# Altium PCB PCB.PcbDoc
Units mm, origin at the board's own origin, x right, y up, seen from the top; angles counter-clockwise.
Board outline 18.8 x 41.15 mm, 2 copper layers (Top Layer, Bottom Layer); 4 components, 32 nets, 96 pads, 0 vias.
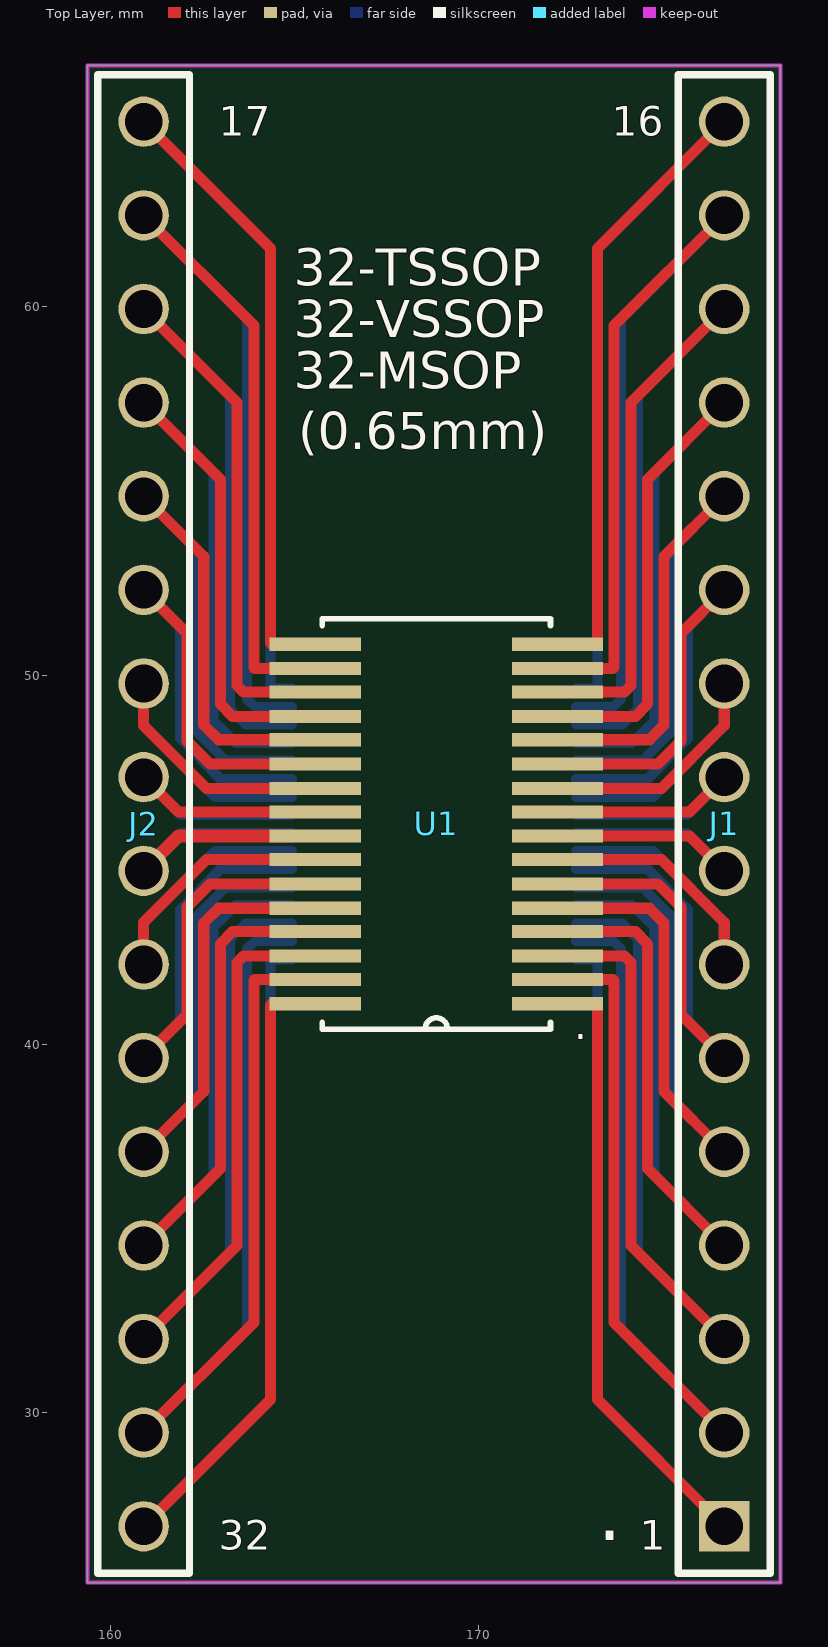
[diagram p0: Top Layer view]
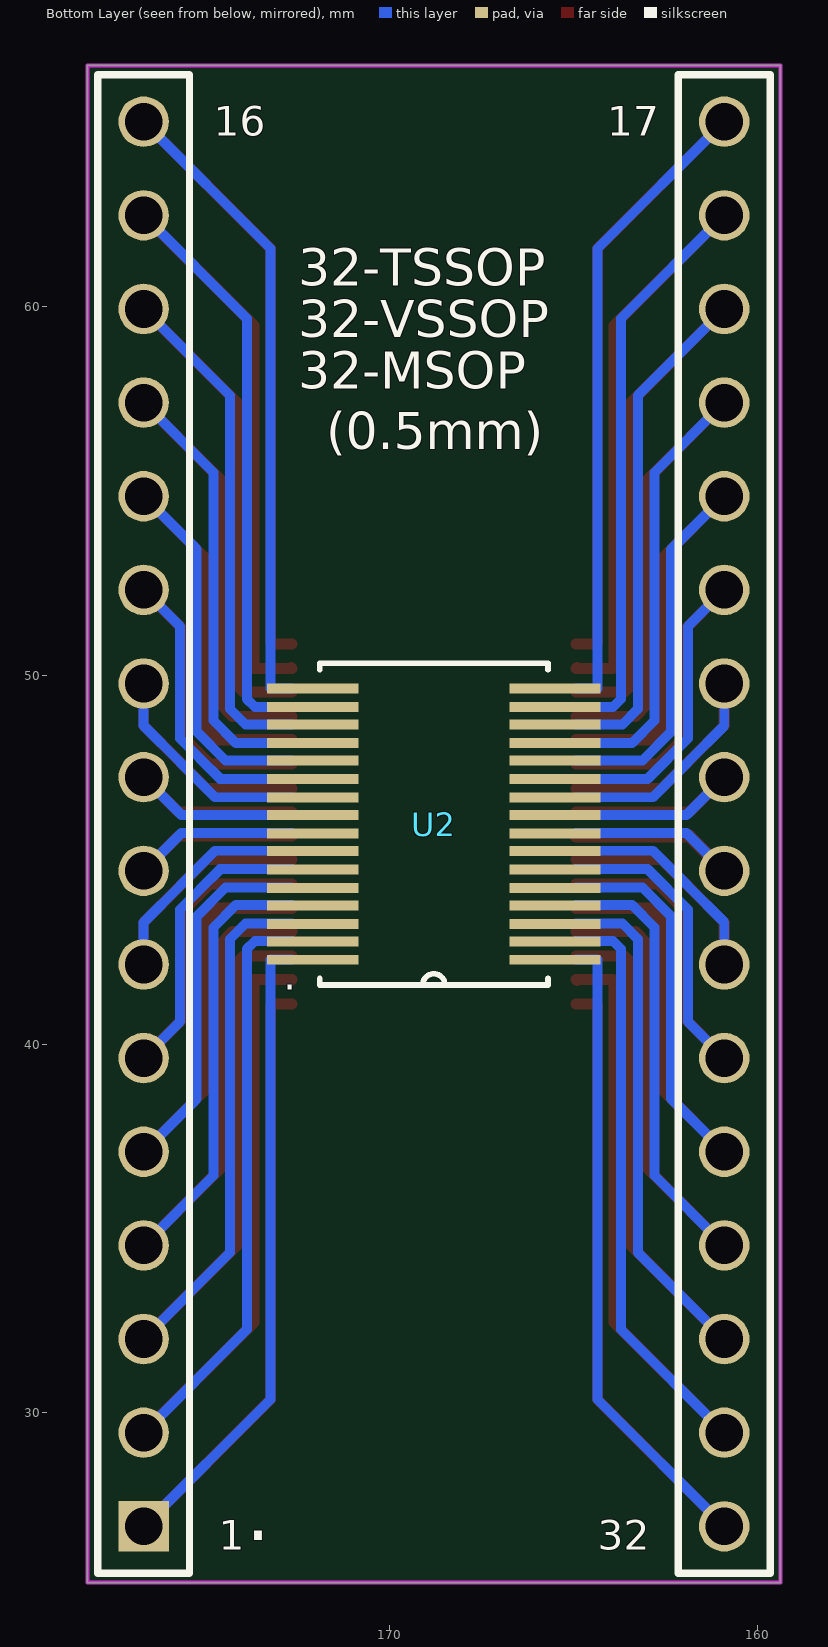
[diagram p1: Bottom Layer view, seen from below]

## Layer stack, top to bottom
Top Solder: solder mask 0.0102, Solder Resist, Dk 3.5
Top Layer: signal copper 0.0356
Dielectric 1: dielectric 0.32, FR-4, Dk 4.8
Bottom Layer: signal copper 0.0356
Bottom Solder: solder mask 0.0102, Solder Resist, Dk 3.5

## Board outline
159.385,25.4 159.385,66.548 178.181,66.548 178.181,25.4

## Design rules (kind name [scope] priority, off if disabled: settings)
Clearance [All] p1: gap=0.152 ignorepadtopadclearanceinfootprint=FALSE except(0: Arc-Hole Track-Hole SMDPad-Hole THPad-Hole Via-Hole Fill-Hole Poly-Hole Region-Hole Text-Hole)
HoleSize [All] p1: absolutevalues=TRUE maxlimit=6.2 minlimit=0.3 maxpercent=80.000 minpercent=20.000
MinimumSolderMaskSliver [All] p1: minsoldermaskwidth=0.1
PolygonConnect ViaConnect [IsVia] p1: connectstyle=Direct reliefconductorwidth=0.254 reliefentries=4 polygonreliefangle="90 Angle" airgapwidth=0.254
PolygonConnect [All] p2: connectstyle=Relief reliefconductorwidth=0.254 reliefentries=4 polygonreliefangle="90 Angle" airgapwidth=0.254
RoutingVias [All] p1: holewidth=0.3 width=0.6 viastyle="Through Hole" minholewidth=0.3 minwidth=0.5 maxholewidth=1 maxwidth=5
SilkToSilkClearance [All] p1: silktosilkclearance=0.1
SilkToSolderMaskClearance [IsPad] p1: minsilkscreentomaskgap=0.1 clearancetoexposedcopper=TRUE
SolderMaskExpansion [All] p1: expansion=0.051 istentingtop=FALSE
Width [All] p1: maxlimit=25.4 minlimit=0.15 preferedwidth=0.3
26 further rules are at their usual default settings.

## Components (designator, comment, footprint, x,y, rotation, side; value= is the part's Value field where it differs from the comment)
J1 "HTSW-116-23-L-S" SAMTEC_HTSW-116-23-L-S#1 176.657,45.974 r270 top
J2 "HTSW-116-23-L-S" SAMTEC_HTSW-116-23-L-S#2 160.909,45.974 r90 top
U1 "PCA9622DR" SOP65P810X110-32N 168.846,45.974 r180 top
U2 "PCA9622DR" SOP65P810X110-32N-0.5mm 168.787,47.169 r180 bottom

## Footprints (in the part's own frame and the unit in brackets; to place one, negate y for a bottom-side part, rotate by r counter-clockwise, add the part's x,y. Pads: shape width x height; smd on the part's side, far side on the other; paste and mask are expansions set on the pad)
SAMTEC_HTSW-116-23-L-S#1 [mm]
  rect 1.37x1.37 hole 1.02: 01(19.05,0)
  round 1.37 hole 1.02: 02(16.51,0) 03(13.97,0) 04(11.43,0) 05(8.89,0) 06(6.35,0) 07(3.81,0) 08(1.27,0) 09(-1.27,0) 10(-3.81,0) 11(-6.35,0) 12(-8.89,0) 13(-11.43,0) 14(-13.97,0) 15(-16.51,0) 16(-19.05,0)
  silkscreen extent -20.32,-1.24 20.32,1.24
SAMTEC_HTSW-116-23-L-S#2 [mm]
  round 1.37 hole 1.02: 01(19.05,0) 02(16.51,0) 03(13.97,0) 04(11.43,0) 05(8.89,0) 06(6.35,0) 07(3.81,0) 08(1.27,0) 09(-1.27,0) 10(-3.81,0) 11(-6.35,0) 12(-8.89,0) 13(-11.43,0) 14(-13.97,0) 15(-16.51,0) 16(-19.05,0)
  silkscreen extent -20.32,-1.24 20.32,1.24
SOP65P810X110-32N [mil]
  rect 97.36x14 smd: 1(-129.31,192) 2(-129.31,166) 3(-129.31,141) 4(-129.31,115) 5(-129.31,90) 6(-129.31,64) 7(-129.31,38) 8(-129.31,13) 9(-129.31,-13) 10(-129.31,-38) 11(-129.31,-64) 12(-129.31,-90) 13(-129.31,-115) 14(-129.31,-141) 15(-129.31,-166) 16(-129.31,-192) 17(129.31,-192) 18(129.31,-166) 19(129.31,-141) 20(129.31,-115) 21(129.31,-90) 22(129.31,-64) 23(129.31,-38) 24(129.31,-13) 25(129.31,13) 26(129.31,38) 27(129.31,64) 28(129.31,90) 29(129.31,115) 30(129.31,141) 31(129.31,166) 32(129.31,192)
  silkscreen extent -122,-219 122,219
SOP65P810X110-32N-0.5mm [mm]
  rect 2.473x0.27 smd mask+0.051: 1(-3.285,-4.877) 2(-3.285,-4.376) 3(-3.285,-3.901) 4(-3.285,-3.401) 5(-3.285,-2.926) 6(-3.285,-2.426) 7(-3.285,-1.925) 8(-3.285,-1.45) 9(-3.285,-0.95) 10(-3.285,-0.475) 11(-3.285,0.026) 12(-3.285,0.526) 13(-3.285,1.001) 14(-3.285,1.501) 15(-3.285,1.976) 16(-3.285,2.477) 17(3.285,2.477) 18(3.285,1.976) 19(3.285,1.501) 20(3.285,1.001) 21(3.285,0.526) 22(3.285,0.026) 23(3.285,-0.475) 24(3.285,-0.95) 25(3.285,-1.45) 26(3.285,-1.925) 27(3.285,-2.426) 28(3.285,-2.926) 29(3.285,-3.401) 30(3.285,-3.901) 31(3.285,-4.376) 32(3.285,-4.877)
  silkscreen extent -3.1,-5.56 3.1,3.16

## Part data
J1 J2: Package=None, Availability=Unavailable, MP=HTSW-116-23-L-S, Price=None
U1 U2: "16-bit Fm+ I2C-bus 100 mA 40 V LED driver", Package=None, Availability=Unavailable, MP=PCA9622DR, Price=None

## Nets (pads, with @x,y where several pads share a name; then routed paths per layer and width w, separated by ;. In a path a pad name is that pad's centre, name@x,y a point inside that pad or via, vN(x,y) a via of type N, cw(c..) or ccw(c..) an arc to the next point about the centre after c; other vN are vias at no path point)
1: J1.01 U1.1 U2.1 | length 33.6
  Top Layer w0.3: U1.1@172.631,41.097 173.188,41.097 173.216,41.069 173.216,30.365 J1.01
  Bottom Layer w0.27: U2.1@172.631,42.297 173.217,42.297 173.217,30.364 J1.01
2: J1.02 U1.2 U2.2 | length 30.2
  Top Layer w0.3: U1.2@172.659,41.73 172.631,41.758 173.645,41.758 173.67,41.732 173.67,32.451 J1.02
  Bottom Layer w0.27: U2.2@172.633,42.798 173.305,42.798 173.307,42.8 173.641,42.8 173.86,42.58 173.86,32.261 J1.02
3: J1.03 U1.3 U2.3 | length 26.5
  Top Layer w0.3: U1.3@172.631,42.393 173.947,42.393 174.122,42.217 174.122,34.539 J1.03
  Bottom Layer w0.27: U2.3@172.631,43.273 173.897,43.273 174.312,42.858 174.312,34.349 J1.03
4: J1.04 U1.4 U2.4 | length 22.9
  Top Layer w0.3: U1.4@172.631,43.053 174.244,43.053 174.575,42.722 174.575,36.626 J1.04
  Bottom Layer w0.27: U2.4@172.631,43.773 174.159,43.773 174.765,43.167 174.765,36.436 J1.04
5: J1.05 U1.5 U2.5 | length 19.3
  Top Layer w0.3: U1.5@172.631,43.688 174.625,43.688 175.027,43.286 175.027,38.714 J1.05
  Bottom Layer w0.27: U2.5@172.631,44.248 174.437,44.248 175.217,43.468 175.217,38.524 J1.05
6: J1.06 U1.6 U2.6 | length 15.6
  Top Layer w0.3: U1.6@172.631,44.348 174.854,44.348 175.48,43.722 175.48,40.801 J1.06
  Bottom Layer w0.27: U2.6@172.631,44.749 174.58,44.749 175.125,44.204 175.125,44.2 175.67,43.655 175.67,40.611 J1.06
7: J1.07 U1.7 U2.7 | length 11.9
  Top Layer w0.3: U1.7@172.631,45.009 174.955,45.009 176.657,43.307 J1.07
  Bottom Layer w0.27: U2.7@172.631,45.249 174.72,45.249 175.67,44.299 175.67,44.295 176.657,43.308 J1.07
8: J1.08 U1.8 U2.8 | length 13.3
  Top Layer w0.3: U1.8@172.631,45.644 175.717,45.644 J1.08
  Bottom Layer w0.27: 175.637,45.724 J1.08 175.637,45.724 ; 175.637,45.724 172.631,45.724 175.637,45.724
9: J1.09 U1.9 U2.9 | length 8.9
  Top Layer w0.3: U1.9@172.631,46.304 175.717,46.304 J1.09
  Bottom Layer w0.27: U2.9@172.631,46.224 175.637,46.224 J1.09
10: J1.10 U1.10 U2.10 | length 11.9
  Top Layer w0.3: U1.10@172.631,46.939 174.955,46.939 176.657,48.641 J1.10
  Bottom Layer w0.27: U2.10@172.631,46.699 174.72,46.699 175.67,47.649 175.67,47.653 176.657,48.64 J1.10
11: J1.11 U1.11 U2.11 | length 15.6
  Top Layer w0.3: U1.11@172.631,47.6 174.854,47.6 175.48,48.226 175.48,51.147 J1.11
  Bottom Layer w0.27: U2.11@172.631,47.199 174.58,47.199 175.125,47.744 175.125,47.748 175.67,48.293 175.67,51.337 J1.11
12: J1.12 U1.12 U2.12 | length 19.3
  Top Layer w0.3: U1.12@172.631,48.26 174.625,48.26 175.027,48.662 175.027,53.234 J1.12
  Bottom Layer w0.27: U2.12@172.631,47.7 174.437,47.7 175.217,48.48 175.217,53.424 J1.12
13: J1.13 U1.13 U2.13 | length 22.9
  Top Layer w0.3: U1.13@172.631,48.895 174.244,48.895 174.575,49.226 174.575,55.322 J1.13
  Bottom Layer w0.27: U2.13@172.631,48.175 174.159,48.175 174.765,48.781 174.765,55.512 J1.13
14: J1.14 U1.14 U2.14 | length 26.5
  Top Layer w0.3: U1.14@172.631,49.555 173.947,49.555 174.122,49.731 174.122,57.409 J1.14
  Bottom Layer w0.27: U2.14@172.631,48.675 173.897,48.675 174.312,49.09 174.312,57.599 J1.14
15: J1.15 U1.15 U2.15 | length 30.2
  Top Layer w0.3: U1.15@172.659,50.218 172.631,50.19 173.645,50.19 173.67,50.216 173.67,59.497 J1.15
  Bottom Layer w0.27: U2.15@172.633,49.15 173.305,49.15 173.307,49.148 173.641,49.148 173.86,49.368 173.86,59.687 J1.15
16: J1.16 U1.16 U2.16 | length 33.6
  Top Layer w0.3: U1.16@172.631,50.851 173.188,50.851 173.216,50.879 173.216,61.583 J1.16
  Bottom Layer w0.27: U2.16@172.631,49.651 173.217,49.651 173.217,61.584 J1.16
17: J2.01 U1.17 U2.17 | length 33.6
  Top Layer w0.3: J2.01 164.35,61.583 164.35,50.879 164.378,50.851 U1.17@164.935,50.851
  Bottom Layer w0.27: J2.01 164.349,61.584 164.349,49.651 U2.17@164.935,49.651
18: J2.02 U1.18 U2.18 | length 30.2
  Top Layer w0.3: J2.02 163.896,59.497 163.896,50.216 163.921,50.19 164.935,50.19 U1.18@164.907,50.218
  Bottom Layer w0.27: J2.02 163.706,59.687 163.706,49.368 163.925,49.148 164.259,49.148 164.261,49.15 U2.18@164.933,49.15
19: J2.03 U1.19 U2.19 | length 26.5
  Top Layer w0.3: J2.03 163.444,57.409 163.444,49.731 163.619,49.555 U1.19@164.935,49.555
  Bottom Layer w0.27: J2.03 163.254,57.599 163.254,49.09 163.669,48.675 U2.19@164.935,48.675
20: J2.04 U1.20 U2.20 | length 22.9
  Top Layer w0.3: J2.04 162.991,55.322 162.991,49.226 163.322,48.895 U1.20@164.935,48.895
  Bottom Layer w0.27: J2.04 162.801,55.512 162.801,48.781 163.407,48.175 U2.20@164.935,48.175
21: J2.05 U1.21 U2.21 | length 19.3
  Top Layer w0.3: J2.05 162.539,53.234 162.539,48.662 162.941,48.26 U1.21@164.935,48.26
  Bottom Layer w0.27: J2.05 162.349,53.424 162.349,48.48 163.129,47.7 U2.21@164.935,47.7
22: J2.06 U1.22 U2.22 | length 15.6
  Top Layer w0.3: J2.06 162.086,51.147 162.086,48.226 162.712,47.6 U1.22@164.935,47.6
  Bottom Layer w0.27: J2.06 161.896,51.337 161.896,48.293 162.441,47.748 162.441,47.744 162.986,47.199 U2.22@164.935,47.199
23: J2.07 U1.23 U2.23 | length 11.9
  Top Layer w0.3: J2.07 160.909,48.641 162.611,46.939 U1.23@164.935,46.939
  Bottom Layer w0.27: J2.07 160.909,48.64 161.896,47.653 161.896,47.649 162.846,46.699 U2.23@164.935,46.699
24: J2.08 U1.24 U2.24 | length 8.9
  Top Layer w0.3: J2.08 161.849,46.304 U1.24@164.935,46.304
  Bottom Layer w0.27: J2.08 161.929,46.224 U2.24@164.935,46.224
25: J2.09 U1.25 U2.25 | length 17.7
  Top Layer w0.3: J2.09 161.849,45.644 U1.25@164.935,45.644
  Top Layer w0.35: J2.09 161.849,45.644 U1.25@164.935,45.644
  Bottom Layer w0.27: 161.929,45.724 164.935,45.724 161.929,45.724 ; 161.929,45.724 J2.09 161.929,45.724
26: J2.10 U1.26 U2.26 | length 11.9
  Top Layer w0.3: J2.10 160.909,43.307 162.611,45.009 U1.26@164.935,45.009
  Bottom Layer w0.27: J2.10 160.909,43.308 161.896,44.295 161.896,44.299 162.846,45.249 U2.26@164.935,45.249
27: J2.11 U1.27 U2.27 | length 15.6
  Top Layer w0.3: J2.11 162.086,40.801 162.086,43.722 162.712,44.348 U1.27@164.935,44.348
  Bottom Layer w0.27: J2.11 161.896,40.611 161.896,43.655 162.441,44.2 162.441,44.204 162.986,44.749 U2.27@164.935,44.749
28: J2.12 U1.28 U2.28 | length 19.3
  Top Layer w0.3: J2.12 162.539,38.714 162.539,43.286 162.941,43.688 U1.28@164.935,43.688
  Bottom Layer w0.27: J2.12 162.349,38.524 162.349,43.468 163.129,44.248 U2.28@164.935,44.248
29: J2.13 U1.29 U2.29 | length 22.9
  Top Layer w0.3: J2.13 162.991,36.626 162.991,42.722 163.322,43.053 U1.29@164.935,43.053
  Bottom Layer w0.27: J2.13 162.801,36.436 162.801,43.167 163.407,43.773 U2.29@164.935,43.773
30: J2.14 U1.30 U2.30 | length 26.5
  Top Layer w0.3: J2.14 163.444,34.539 163.444,42.217 163.619,42.393 U1.30@164.935,42.393
  Bottom Layer w0.27: J2.14 163.254,34.349 163.254,42.858 163.669,43.273 U2.30@164.935,43.273
31: J2.15 U1.31 U2.31 | length 30.2
  Top Layer w0.3: J2.15 163.896,32.451 163.896,41.732 163.921,41.758 164.935,41.758 U1.31@164.907,41.73
  Bottom Layer w0.27: J2.15 163.706,32.261 163.706,42.58 163.925,42.8 164.259,42.8 164.261,42.798 U2.31@164.933,42.798
32: J2.16 U1.32 U2.32 | length 33.6
  Top Layer w0.3: J2.16 164.35,30.365 164.35,41.069 164.378,41.097 U1.32@164.935,41.097
  Bottom Layer w0.27: J2.16 164.349,30.364 164.349,42.297 U2.32@164.935,42.297

## Keep-outs
Keep-Out Layer:
  the board outline again, w0.1

## Silkscreen, mask and mechanical layers (free items; w line width, h text height)
Top Overlay:
  text "17" at 162.941,64.643 h0.8
  text "16" at 173.609,64.643 h0.8
  text "32-TSSOP" at 164.973,60.579 h1
  text "32-VSSOP" at 164.973,59.182 h1
  text "32-MSOP" at 164.973,57.785 h1
  text "(0.65mm)" at 165.1,56.134 h1
  text "." at 172.593,40.132 h0.8
  text "." at 173.228,26.543 h1.5
  text "32" at 162.941,26.289 h0.8
  text "1" at 174.371,26.289 h0.8
Bottom Overlay:
  lines w0.2: 159.665,25.654 159.665,66.294 162.153,66.294 162.153,25.654 159.665,25.654 ; 175.413,25.654 177.901,25.654 177.901,66.294 175.413,66.294 175.413,25.654
  text "17" at 164.084,64.643 h0.8
  text "16" at 174.752,64.643 h0.8
  text "32-TSSOP" at 172.466,60.579 h1
  text "32-VSSOP" at 172.466,59.182 h1
  text "32-MSOP" at 172.466,57.785 h1
  text "(0.5mm)" at 171.704,56.134 h1
  text "." at 172.525,41.474 h0.8
  text "." at 173.228,26.543 h1.5
  text "32" at 164.338,26.289 h0.8
  text "1" at 174.625,26.289 h0.8